# Altium PCB PCB.PcbDoc
Units mm, origin at the board's own origin, x right, y up, seen from the top; angles counter-clockwise.
Board outline 90 x 90 mm, 2 copper layers (Top Layer, Bottom Layer), stack 0.325 mm thick; 47 components, 141 nets, 406 pads, 91 vias.
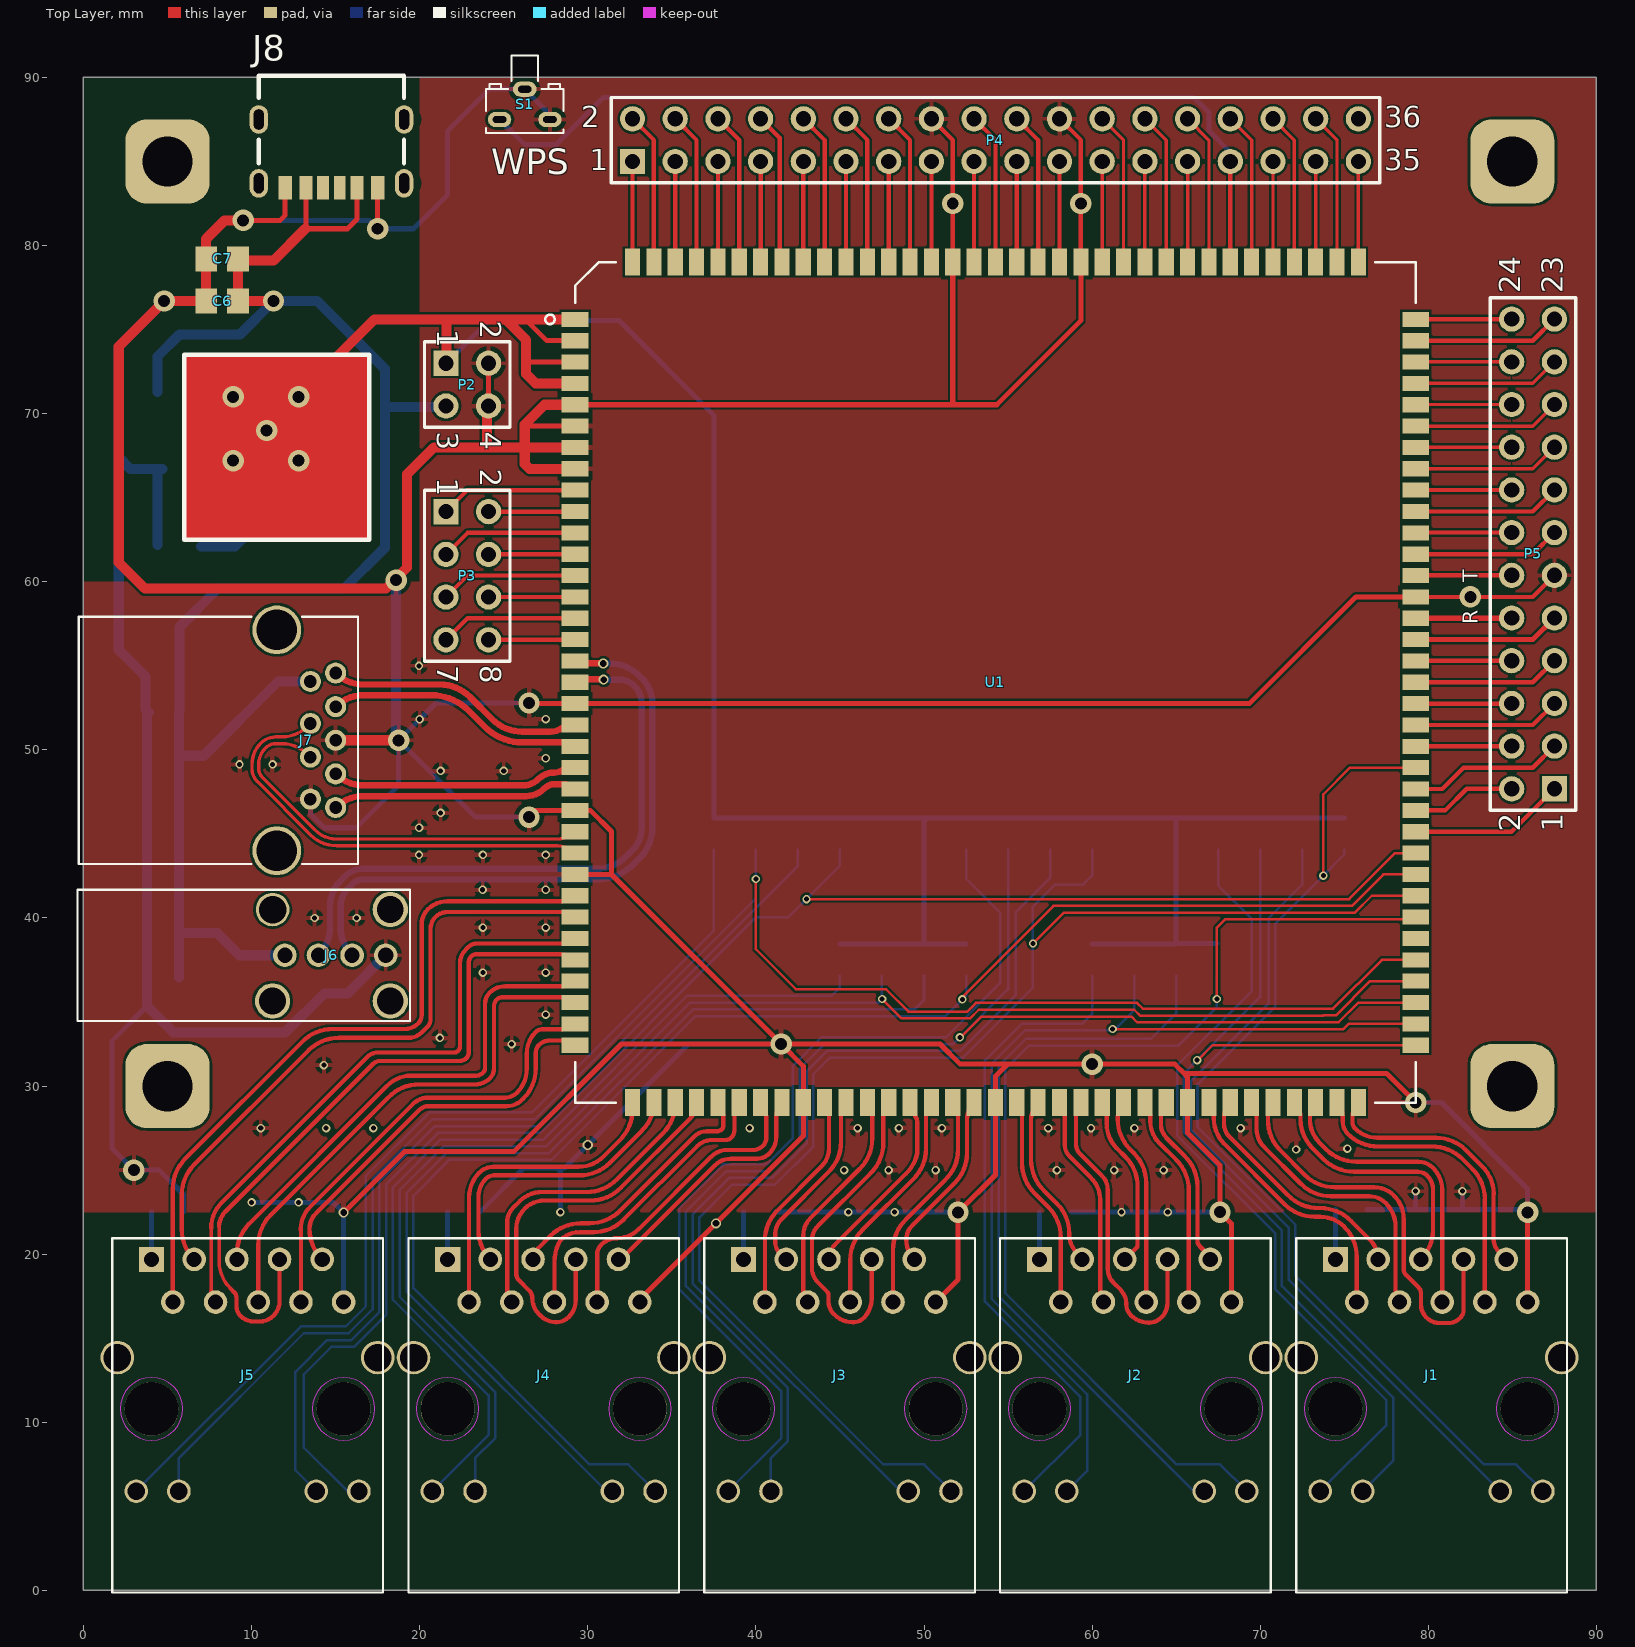
[diagram p0: Top Layer view]
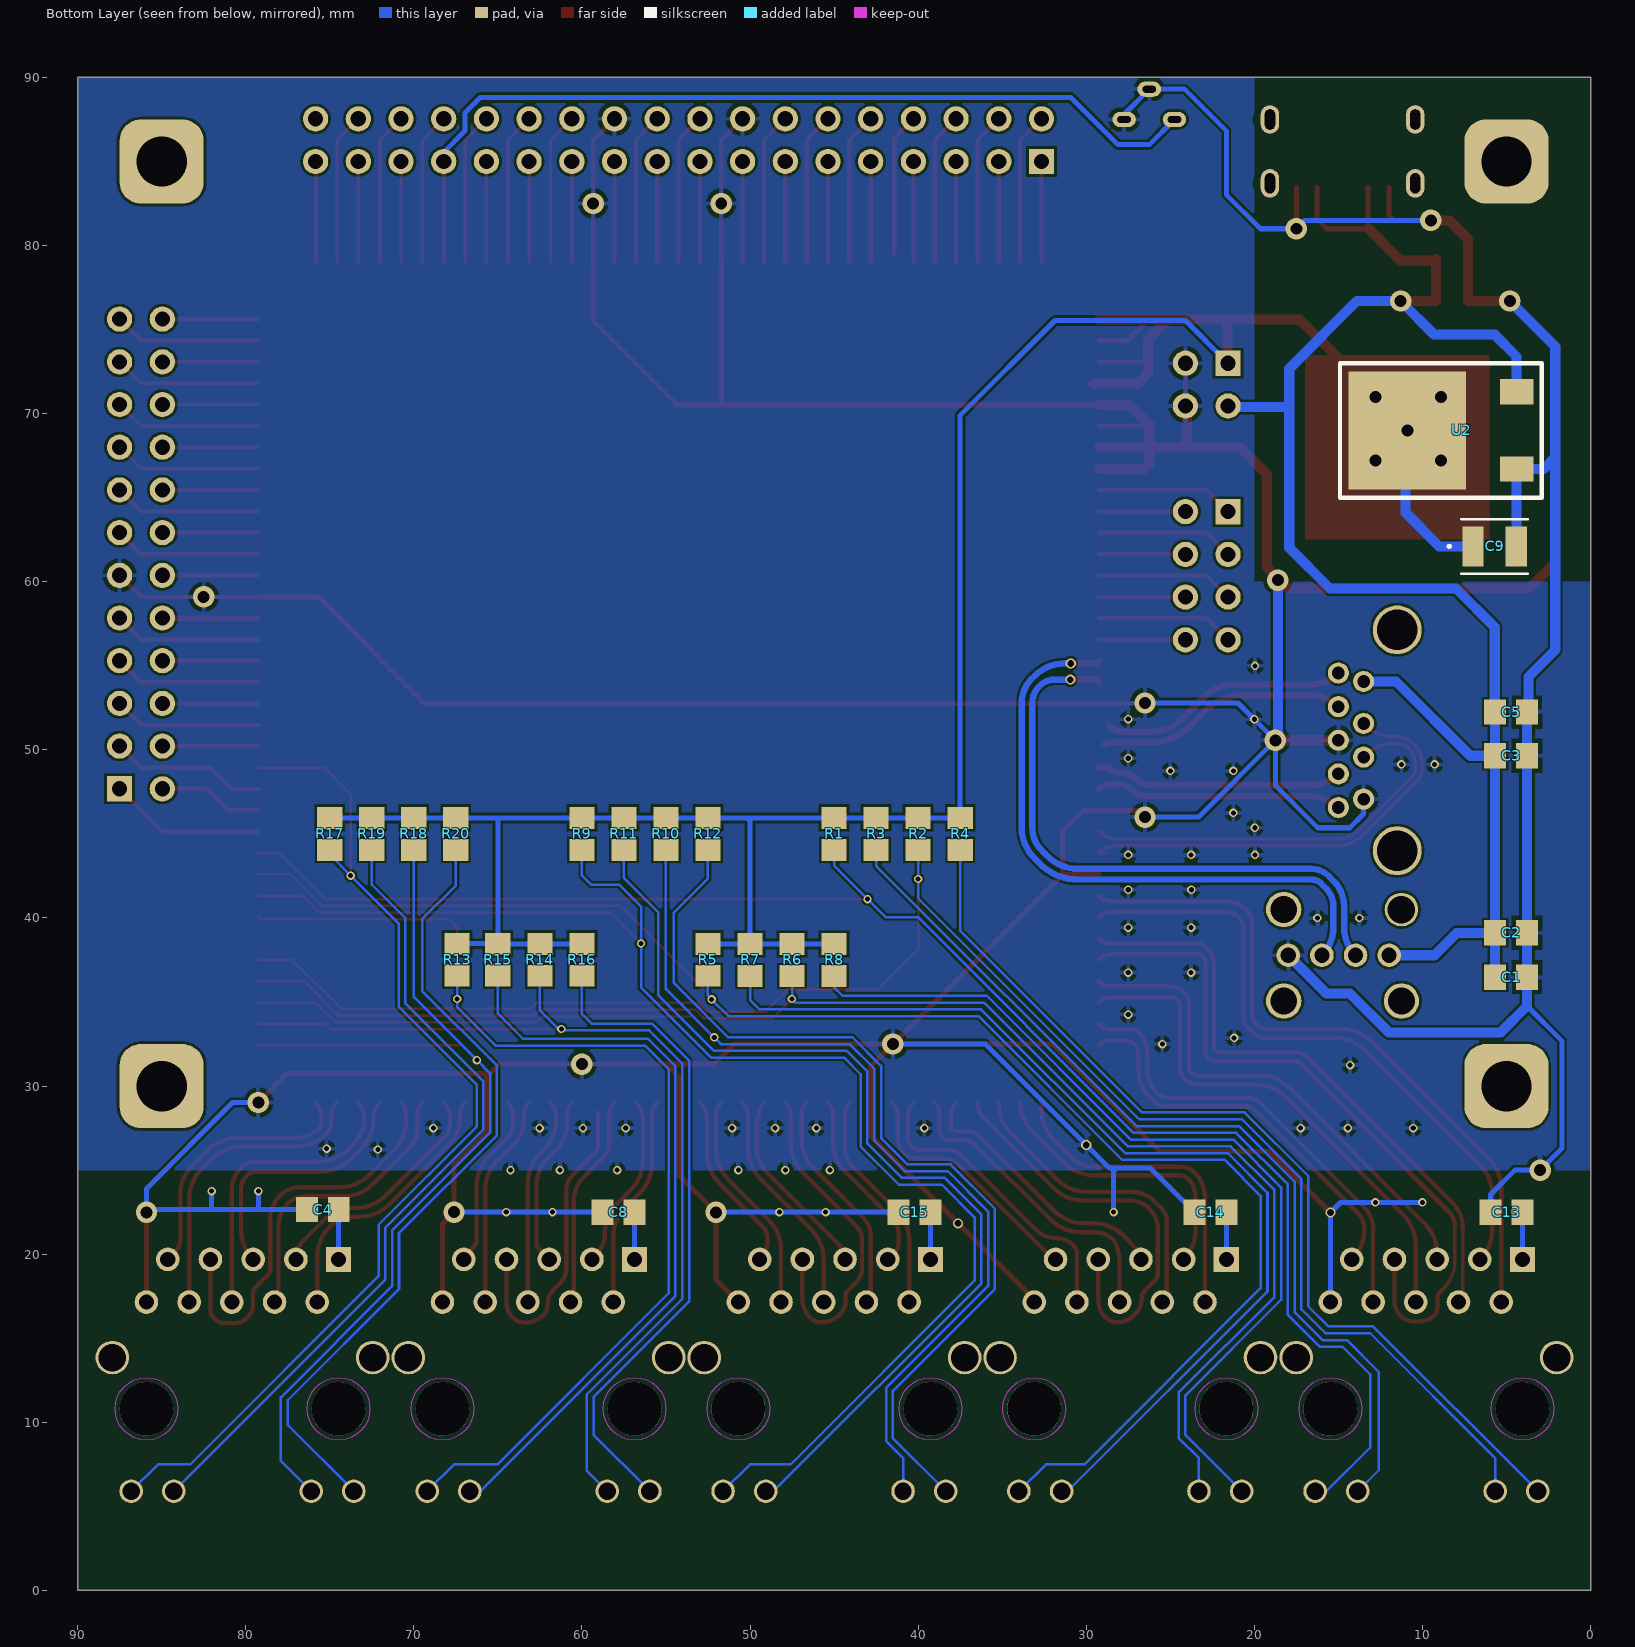
[diagram p1: Bottom Layer view, seen from below]

## Layer stack, top to bottom
Top Solder: solder mask 0.0102, Solder Resist, Dk 3.5
Top Layer: signal copper 0.0356
Dielectric 1: core 0.254, FR-4, Dk 4.2
Bottom Layer: signal copper 0.0356
Bottom Solder: solder mask 0.0102, Solder Resist, Dk 3.5

## Board outline
0,0 0,90 90,90 90,0

## Design rules (kind name [scope] priority, off if disabled: settings)
Clearance [All] p1: gap=0.15 ignorepadtopadclearanceinfootprint=FALSE
DiffPairsRouting DiffPair_DiffPairsRouting [All] p1: maxlimit=0.254 minlimit=0.2 mostfreqgap=0.2 toplayer_minwidth=0.2 toplayer_maxwidth=0.381 toplayer_prefwidth=0.2 bottomlayer_minwidth=0.2 bottomlayer_maxwidth=0.381 bottomlayer_prefwidth=0.2 maxuncoupledlength=12.7
DiffPairsRouting DiffPair_DiffPairsRouting_1 [All] p2: maxlimit=0.254 minlimit=0.254 mostfreqgap=0.254 toplayer_minwidth=0.381 toplayer_maxwidth=0.381 toplayer_prefwidth=0.381 bottomlayer_minwidth=0.381 bottomlayer_maxwidth=0.381 bottomlayer_prefwidth=0.381 maxuncoupledlength=12.7
DiffPairsRouting [All] p3: maxlimit=0.254 minlimit=0.254 mostfreqgap=0.254 toplayer_minwidth=0.381 toplayer_maxwidth=0.381 toplayer_prefwidth=0.381 bottomlayer_minwidth=0.381 bottomlayer_maxwidth=0.381 bottomlayer_prefwidth=0.381 maxuncoupledlength=12.7
MatchedLengths DiffPair_MatchedLengths [All] p1: tolerance=10 checknetsindiffpair=TRUE checkdiffpairvsdiffpair=FALSE checkxsignals=FALSE checkothers=FALSE
MatchedLengths DiffPair_MatchedLengths_1 [All] p2: tolerance=5 checknetsindiffpair=TRUE checkdiffpairvsdiffpair=FALSE checkxsignals=FALSE checkothers=FALSE
PolygonConnect [All] p1: connectstyle=Relief reliefconductorwidth=0.254 reliefentries=4 polygonreliefangle="90 Angle" airgapwidth=0.254
RoutingVias [All] p1: holewidth=0.711 width=1.27 viastyle="Through Hole" minholewidth=0.711 minwidth=1.27 maxholewidth=0.711 maxwidth=1.27
SolderMaskExpansion [All] p1: expansion=0.102
Width [All] p1: maxlimit=0.8 minlimit=0.15 preferedwidth=0.3
29 further rules are at their usual default settings.

## Classes and differential pairs
differential pair USB3: +USB3_P -USB3_N
differential pair USB3_SS_TX: +USB3_SS_TX_P -USB3_SS_TX_N
differential pair USB3_SS_RX: +USB3_SS_RX_P -USB3_SS_RX_N
differential pair USB2: +USB2_P -USB2_N
differential pair PCIE_TX2: +PCIE_TX2_P -PCIE_TX2_N
differential pair PCIE_TX1: +PCIE_TX1_P -PCIE_TX1_N
differential pair PCIE_TX0: +PCIE_TX0_P -PCIE_TX0_N
differential pair PCIE_RX2: +PCIE_RX2_P -PCIE_RX2_N
differential pair PCIE_RX1: +PCIE_RX1_P -PCIE_RX1_N
differential pair PCIE_RX0: +PCIE_RX0_P -PCIE_RX0_N
differential pair PCIE_CK2: +PCIE_CK2_P -PCIE_CK2_N
differential pair PCIE_CK1: +PCIE_CK1_P -PCIE_CK1_N
differential pair PCIE_CK0: +PCIE_CK0_P -PCIE_CK0_N

## Components (designator, comment, footprint, x,y, rotation, side; value= is the part's Value field where it differs from the comment)
C1 "Cap" 6-0805 4.725,36.475 r180 bottom value=0.1uF
C2 "Cap" 6-0805 4.725,39.125 r180 bottom value=106/10V
C3 "Cap" 6-0805 4.725,49.65 r180 bottom value=0.1uF
C4 "Cap" 6-0805 75.413,22.657 r0 bottom value=1nF/100V
C5 "Cap" 6-0805 4.725,52.25 r180 bottom value=106/10V
C6 "Cap" 6-0805 8.25,76.7 r0 top value=4.7uF
C7 "Cap" 6-0805 8.25,79.2 r0 top value=0.1uF
C8 "Cap" 6-0805 57.824,22.5 r0 bottom value=1nF/100V
C9 "Cap Pol2" 3528B 5.707,62.1 r180 bottom value=22uF
C13 "Cap" 6-0805 4.999,22.5 r0 bottom value=1nF/100V
C14 "Cap" 6-0805 22.615,22.5 r180 bottom value=1nF/100V
C15 "Cap" 6-0805 40.215,22.5 r0 bottom value=1nF/100V
J1 "RJ45_HR911130" RJ45_HR911130 74.475,10.8 r180 top locked
J2 "RJ45_HR911130" RJ45_HR911130 56.865,10.8 r180 top locked
J3 "RJ45_HR911130" RJ45_HR911130 39.265,10.8 r180 top locked
J4 "RJ45_HR911130" RJ45_HR911130 21.665,10.8 r180 top locked
J5 "RJ45_HR911130" RJ45_HR911130 4.045,10.8 r180 top locked
J6 "USB2.0" USB2.0 11.98,37.78 r270 top locked
J7 "USB3.0" USB3.0_0 13.5,54.07 r270 top locked
J8 "USB Type-C 6P" "USB Type-C 6P" 14.75,87.5 r180 top
P2 "Header 2X2" HDR2X2 21.56,73 r270 top
P3 "Header 4X2" HDR2X4 21.56,64.169 r270 top locked
P4 "Header 18X2" HDR2X18 32.661,85 r0 top locked
P5 "Header 12X2" HDR2X12 87.5,47.684 r90 top locked
R1 "Res2" 6-0805 45,45 r90 bottom value=4.7K
R2 "Res2" 6-0805 40,45 r270 bottom value=4.7K
R3 "Res2" 6-0805 42.5,45 r90 bottom value=330R
R4 "Res2" 6-0805 37.5,45 r270 bottom value=330R
R5 "Res2" 6-0805 52.5,37.51 r90 bottom value=4.7K
R6 "Res2" 6-0805 47.5,37.5 r270 bottom value=4.7K
R7 "Res2" 6-0805 50,37.5 r90 bottom value=330R
R8 "Res2" 6-0805 45,37.5 r270 bottom value=330R
R9 "Res2" 6-0805 60,45 r90 bottom value=4.7K
R10 "Res2" 6-0805 55,45 r270 bottom value=4.7K
R11 "Res2" 6-0805 57.5,45 r90 bottom value=330R
R12 "Res2" 6-0805 52.5,45 r270 bottom value=330R
R13 "Res2" 6-0805 67.427,37.52 r90 bottom value=4.7K
R14 "Res2" 6-0805 62.5,37.51 r270 bottom value=4.7K
R15 "Res2" 6-0805 65,37.52 r90 bottom value=330R
R16 "Res2" 6-0805 60,37.51 r270 bottom value=330R
R17 "Res2" 6-0805 75,45 r90 bottom value=4.7K
R18 "Res2" 6-0805 70,45 r270 bottom value=4.7K
R19 "Res2" 6-0805 72.5,45 r90 bottom value=330R
R20 "Res2" 6-0805 67.5,45 r270 bottom value=330R
S1 "SW_PB" SW_PB 26.25,89.3 r90 top
U1 "MT7621A" HLK-7621 29.25,75.61 r0 top locked
U2 "AMS1084CD-3.3" TO252 10.9,69 r90 bottom

## Footprints (in the part's own frame and the unit in brackets; to place one, negate y for a bottom-side part, rotate by r counter-clockwise, add the part's x,y. Pads: shape width x height; smd on the part's side, far side on the other; paste and mask are expansions set on the pad)
6-0805 [mm] "Chip Resistor; Body 2 x 1.2 mm (LxW typ)"
  rect 1.3x1.5 smd: 1(-0.95,0) 2(0.95,0)
3528B [mm]
  rect 1.262x2.363 smd paste+0 mask+0: 1(-1.293,0) 2(1.293,0)
  silkscreen extent -2.78,-1.63 1.98,1.63, body extent 0,0 0.25,0.25, height 0.25
HDR2X2 [mm] "Connector; Header; 2x2 Position"
  rect 1.5x1.5 hole 0.9: 1(0,0)
  round 1.5 hole 0.9: 2(0,2.54) 3(2.54,0) 4(2.54,2.54)
  silkscreen extent -1.27,-1.27 3.81,3.81
HDR2X4 [mm] "Connector; Header; 4x2 Position"
  rect 1.5x1.5 hole 0.9: 1(0,0)
  round 1.5 hole 0.9: 2(0,2.54) 3(2.54,0) 4(2.54,2.54) 5(5.08,0) 6(5.08,2.54) 7(7.62,0) 8(7.62,2.54)
  silkscreen extent -1.27,-1.27 8.89,3.81
HDR2X12 [mm] "Connector; Header; 12x2 Position"
  rect 1.5x1.5 hole 0.9: 1(0,0)
  round 1.5 hole 0.9: 2(0,2.54) 3(2.54,0) 4(2.54,2.54) 5(5.08,0) 6(5.08,2.54) 7(7.62,0) 8(7.62,2.54) 9(10.16,0) 10(10.16,2.54) 11(12.7,0) 12(12.7,2.54) 13(15.24,0) 14(15.24,2.54) 15(17.78,0) 16(17.78,2.54) 17(20.32,0) 18(20.32,2.54) 19(22.86,0) 20(22.86,2.54) 21(25.4,0) 22(25.4,2.54) 23(27.94,0) 24(27.94,2.54)
  silkscreen extent -1.27,-1.27 29.21,3.81
HDR2X18 [mm] "Connector; Header; 18x2 Position"
  rect 1.5x1.5 hole 0.9: 1(0,0)
  round 1.5 hole 0.9: 2(0,2.54) 3(2.54,0) 4(2.54,2.54) 5(5.08,0) 6(5.08,2.54) 7(7.62,0) 8(7.62,2.54) 9(10.16,0) 10(10.16,2.54) 11(12.7,0) 12(12.7,2.54) 13(15.24,0) 14(15.24,2.54) 15(17.78,0) 16(17.78,2.54) 17(20.32,0) 18(20.32,2.54) 19(22.86,0) 20(22.86,2.54) 21(25.4,0) 22(25.4,2.54) 23(27.94,0) 24(27.94,2.54) 25(30.48,0) 26(30.48,2.54) 27(33.02,0) 28(33.02,2.54) 29(35.56,0) 30(35.56,2.54) 31(38.1,0) 32(38.1,2.54) 33(40.64,0) 34(40.64,2.54) 35(43.18,0) 36(43.18,2.54)
  silkscreen extent -1.27,-1.27 44.45,3.81
HLK-7621 [mm]
  rect 1.6x0.9 smd: 1(0,0) 2(0,-1.27) 3(0,-2.54) 4(0,-3.81) 5(0,-5.08) 6(0,-6.35) 7(0,-7.62) 8(0,-8.89) 9(0,-10.16) 10(0,-11.43) 11(0,-12.7) 12(0,-13.97) 13(0,-15.24) 14(0,-16.51) 15(0,-17.78) 16(0,-19.05) 17(0,-20.32) 18(0,-21.59) 19(0,-22.86) 20(0,-24.13) 21(0,-25.4) 22(0,-26.67) 23(0,-27.94) 24(0,-29.21) 25(0,-30.48) 26(0,-31.75) 27(0,-33.02) 28(0,-34.29) 29(0,-35.56) 30(0,-36.83) 31(0,-38.1) 32(0,-39.37) 33(0,-40.64) 34(0,-41.91) 35(0,-43.18) 71(50,-43.18) 72(50,-41.91) 73(50,-40.64) 74(50,-39.37) 75(50,-38.1) 76(50,-36.83) 77(50,-35.56) 78(50,-34.29) 79(50,-33.02) 80(50,-31.75) 81(50,-30.48) 82(50,-29.21) 83(50,-27.94) 84(50,-26.67) 85(50,-25.4) 86(50,-24.13) 87(50,-22.86) 88(50,-21.59) 89(50,-20.32) 90(50,-19.05) 91(50,-17.78) 92(50,-16.51) 93(50,-15.24) 94(50,-13.97) 95(50,-12.7) 96(50,-11.43) 97(50,-10.16) 98(50,-8.89) 99(50,-7.62) 100(50,-6.35) 101(50,-5.08) 102(50,-3.81) 103(50,-2.54) 104(50,-1.27) 105(50,0)
  rect 0.9x1.6 smd: 36(3.41,-46.59) 37(4.68,-46.59) 38(5.95,-46.59) 39(7.22,-46.59) 40(8.49,-46.59) 41(9.76,-46.59) 42(11.03,-46.59) 43(12.3,-46.59) 44(13.57,-46.59) 45(14.84,-46.59) 46(16.11,-46.59) 47(17.38,-46.59) 48(18.65,-46.59) 49(19.92,-46.59) 50(21.19,-46.59) 51(22.46,-46.59) 52(23.73,-46.59) 53(25,-46.59) 54(26.27,-46.59) 55(27.54,-46.59) 56(28.81,-46.59) 56(28.81,-46.59) 57(30.08,-46.59) 58(31.35,-46.59) 59(32.62,-46.59) 60(33.89,-46.59) 61(35.16,-46.59) 62(36.43,-46.59) 63(37.7,-46.59) 64(38.97,-46.59) 65(40.24,-46.59) 66(41.51,-46.59) 67(42.78,-46.59) 68(44.05,-46.59) 69(45.32,-46.59) 70(46.59,-46.59) 106(46.59,3.41) 107(45.32,3.41) 108(44.05,3.41) 109(42.78,3.41) 110(41.51,3.41) 111(40.24,3.41) 112(38.97,3.41) 113(37.7,3.41) 114(36.43,3.41) 115(35.16,3.41) 116(33.89,3.41) 117(32.62,3.41) 118(31.35,3.41) 119(30.08,3.41) 120(28.81,3.41) 121(27.54,3.41) 122(26.27,3.41) 123(25,3.41) 124(23.73,3.41) 125(22.46,3.41) 126(21.19,3.41) 127(19.92,3.41) 128(18.65,3.41) 129(17.38,3.41) 130(16.11,3.41) 131(14.84,3.41) 132(13.57,3.41) 133(12.3,3.41) 134(11.03,3.41) 135(9.76,3.41) 136(8.49,3.41) 137(7.22,3.41) 138(5.95,3.41) 139(4.68,3.41) 140(3.41,3.41)
  silkscreen extent -1.78,-46.59 50,3.41
RJ45_HR911130 [mm]
  rect 1.5x1.5 hole 0.9: 1(0,-8.89)
  round 1.4 hole 0.9: 2(-1.27,-6.35) 3(-2.54,-8.89) 4(-3.81,-6.35) 5(-5.08,-8.89) 6(-6.35,-6.35) 7(-7.62,-8.89) 8(-8.89,-6.35) 9(-10.16,-8.89) 10(-11.43,-6.35)
  round 1.4 hole 1.03: 11(0.91,4.9) 12(-1.63,4.9) 13(-9.8,4.9) 14(-12.34,4.9)
  round 2 hole 1.63: ""(-13.46,-3.05)
  round 3.2 hole 3.2 unplated: ""(-11.43,0) ""(0,0)
  round 2 hole 1.63 unplated: ""(2.03,-3.05)
  Keep-Out Layer pour cut-out: -13.293,0 -13.257,-0.363 -13.151,-0.713 -12.979,-1.035 -12.747,-1.317 -12.465,-1.549 -12.143,-1.721 -11.793,-1.827 -11.43,-1.863 -11.067,-1.827 -10.717,-1.721 -10.395,-1.549 -10.113,-1.317 -9.881,-1.035 -9.709,-0.713 -9.603,-0.363 -9.567,0 -9.603,0.363 -9.709,0.713 -9.881,1.035 -10.113,1.317 -10.395,1.549 -10.717,1.721 -11.067,1.827 -11.43,1.863 -11.793,1.827 -12.143,1.721 -12.465,1.549 -12.747,1.317 -12.979,1.035 -13.151,0.713 -13.257,0.363
  Keep-Out Layer pour cut-out: -1.863,0 -1.827,-0.363 -1.721,-0.713 -1.549,-1.035 -1.317,-1.317 -1.035,-1.549 -0.713,-1.721 -0.363,-1.827 0,-1.863 0.363,-1.827 0.713,-1.721 1.035,-1.549 1.317,-1.317 1.549,-1.035 1.721,-0.713 1.827,-0.363 1.863,0 1.827,0.363 1.721,0.713 1.549,1.035 1.317,1.317 1.035,1.549 0.713,1.721 0.363,1.827 0,1.863 -0.363,1.827 -0.713,1.721 -1.035,1.549 -1.317,1.317 -1.549,1.035 -1.721,0.713 -1.827,0.363
  silkscreen extent -13.76,-10.15 2.33,10.92
SW_PB [mm]
  oval 0.9x1.4 hole 0.4 slot 0.8 at 90 deg: 1(-1.8,1.5) 2(-1.8,-1.5) 3(0,0)
  silkscreen extent -2.6,-2.3 2,2.3
TO252 [mm]
  rect 1.5x2 smd paste+0 mask+0: 1(-2.3,-6.5) 3(2.3,-6.5)
  rect 7x7 smd paste+0 mask+0: 2(0,0)
  silkscreen extent -4,-8 4,4
USB2.0 [mm]
  round 1.4 hole 0.9: 1(0,0) 2(0,2) 3(0,4) 4(0,6)
  round 2.1 hole 1.6: 5(2.72,-0.73) 7(2.72,6.27) 8(-2.72,6.27)
  round 2 hole 1.63: 6(-2.72,-0.73)
  silkscreen extent -3.9,-12.33 3.9,7.44
USB3.0_0 [mm]
  round 1.25 hole 0.75: 1(0,0) 2(2.5,0) 3(4.5,0) 4(7,0) 5(7.5,1.5) 6(5.5,1.5) 7(3.5,1.5) 8(1.5,1.5) 9(-0.5,1.5)
  round 2.9 hole 2.4: ""(-3.07,-2) ""(10.07,-2)
  silkscreen extent -3.85,-13.78 10.85,2.82
"USB Type-C 6P" [mm]
  rect 0.7x1.4 smd paste+0 mask+0: A5(-0.5,4.05) B5(0.5,4.05)
  rect 0.76x1.4 smd paste+0 mask+0: A9(1.52,4.05) B9(-1.52,4.05)
  rect 0.8x1.4 smd paste+0 mask+0: A12(2.75,4.05) B12(-2.75,4.05)
  oval 1.1x1.7 hole 1.2 slot 0.6 at 0 deg unplated: ""(-4.32,3.8) ""(-4.32,0) ""(4.32,3.8) ""(4.32,0)
  silkscreen extent -4.32,-2.6 4.32,2.6

## Part data
C1 C2 C3 C4 C5 C6 C7 C8 C13 C14 C15: "Capacitor", LatestRevisionDate=17-Jul-2002, LatestRevisionNote="Re-released for DXP Platform.", PackageDescription="Radial Cap, Thru-Hole; 2 Leads; 0.3 in Pin Spacing", PackageReference=RAD-0.3, Published=8-Jun-2000, Publisher="Altium Limited"
C9: "Polarized Capacitor (Axial)", LatestRevisionDate=17-Jul-2002, LatestRevisionNote="Re-released for DXP Platform.", PackageDescription="Polarized Capacitor; 2 Leads", PackageReference=POLAR0.8, Published=8-Jun-2000, Publisher="Altium Limited"
P2: "Header, 2-Pin, Dual row", LatestRevisionDate=17-Jul-2002, LatestRevisionNote="Re-released for DXP Platform.", Publisher="Altium Limited"
P3: "Header, 4-Pin, Dual row", LatestRevisionDate=17-Jul-2002, LatestRevisionNote="Re-released for DXP Platform.", Publisher="Altium Limited"
P4: "Header, 18-Pin, Dual row", LatestRevisionDate=17-Jul-2002, LatestRevisionNote="Re-released for DXP Platform.", Publisher="Altium Limited"
P5: "Header, 12-Pin, Dual row", LatestRevisionDate=17-Jul-2002, LatestRevisionNote="Re-released for DXP Platform.", Publisher="Altium Limited"
R1 R2 R3 R4 R5 R6 R7 R8 R9 R10 R11 R12 R13 R14 R15 R16 R17 R18 R19 R20: "Resistor", LatestRevisionDate=17-Jul-2002, LatestRevisionNote="Re-released for DXP Platform.", PackageDescription="Axial Device, Thru-Hole; 2 Leads; 0.4 in Pin Spacing", PackageReference=AXIAL-0.4, Published=8-Jun-2000, Publisher="Altium Limited"

## Free pads (board coordinates)
  rrect50% 5x5 hole 3: 1(5,85) 2(85,85) 3(5,30) 4(85,30)

## Via types
v1: diameter 0.5, hole 0.3, Top Layer to Bottom Layer, 63 vias
v2: diameter 1.27, hole 0.711, Top Layer to Bottom Layer, 23 vias
v3: diameter 0.6, hole 0.4, Top Layer to Bottom Layer, 5 vias

## Nets (pads, with @x,y where several pads share a name; then routed paths per layer and width w, separated by ;. In a path a pad name is that pad's centre, name@x,y a point inside that pad or via, vN(x,y) a via of type N, cw(c..) or ccw(c..) an arc to the next point about the centre after c; other vN are vias at no path point)
3V3: C9.1 P2.1 R1.2 R2.1 R3.2 R4.1 R5.2 R6.1 R7.2 R8.1 R9.2 R10.1 R11.2 R12.1 R13.2 R14.1 R15.2 R16.1 R17.2 R18.1 R19.2 R20.1 U1.1 U1.2 U1.3 U1.4 U2.2 | length 165.9
  Top Layer w0.3: v2@10.7,69 v2(10.9,69) ; v2@10.9,69.1 v2(10.9,69) ; v2@11,69 v2(10.9,69) ; 26.335,73.07 U1.3 ; 26.4,75.5 27.56,74.34 U1.2
  Top Layer w0.6: v2(8.9,67.2) v2@10.7,69 ; v2(8.9,71) v2(10.9,69) ; v2@10.9,69.1 v2(12.8,71) 12.8,71.1 17.31,75.61 21.6,75.61 ; v2@11,69 v2(12.8,67.2) ; P2.1@21.6,73 21.6,75.61 ; U1.1 25.1,75.61 ; U1.4@29.6,71.8 U1.4 26.9,71.8 26.335,72.365 26.335,73.07 26.335,74.375 25.1,75.61 ; 21.6,75.61 25.1,75.61
  Bottom Layer w0.3: P2.1 24.1,75.54 31.859,75.54 37.5,69.899 R4.1 R2.1 R3.2 R1.2 50.198,45.95 ; R8.1 R6.1 R7.2 ; R5.2 50.01,38.46 R7.2 ; R16.1 R14.1 64.99,38.46 R15.2 ; R13.2 R15.2 ; R17.2 R19.2 R18.1 R20.1 65.006,45.95 ; R7.2 50,45.752 50.198,45.95 ; 50.198,45.95 R12.1 R10.1 R11.2 R9.2 65.006,45.95 ; R15.2 65,45.944 65.006,45.95
  Bottom Layer w0.6: C9.1 9,62.1 11,64.1 U2.2@11,68.9
5VD: C1.1 C2.1 C3.1 C5.1 C6.2 C7.2 J6.1 J7.1 J8.A9 J8.B9 P2.3 U2.3 | length 101.4
  Top Layer w0.3: J8.A9 13.23,81.03 13.2,81 15.7,81 16.27,81.57 J8.B9
  Top Layer w0.6: C6.2 v2(11.3,76.7) ; C6.2@9.2,76.9 C7.2 9.3,79.1 11.3,79.1 13.2,81
  Bottom Layer w0.3: C1.1 5.675,36.425 C1.1@5.7,36.4 ; C2.1@5.675,39.325 C2.1@5.9,39.1 ; C3.1@5.675,49.725 C3.1@5.7,49.7
  Bottom Layer w0.6: U2.3 4.4,73.4 5.7,74.7 9.3,74.7 v2(11.3,76.7) 13.9,76.7 17.925,72.675 17.925,70.4 ; C1.1 C2.1 ; C2.1@5.675,39.325 C3.1 7.152,49.65 11.572,54.07 J7.1 ; C3.1@5.675,49.725 C5.1 ; C5.1@5.7,52.3 5.7,57.3 8,59.6 15.5,59.6 17.925,62.025 17.925,70.4 ; C2.1@5.9,39.1 7.959,39.1 9.279,37.78 J6.1 ; P2.3@21.7,70.5 21.6,70.4 17.925,70.4
A_POR_BPS: P5.1 U1.81 | length 9.3
  Top Layer w0.254: U1.81 84.946,45.13 P5.1
CH340_RX: P5.13 U1.94 | length 8.8
  Top Layer w0.254: U1.94 86.216,61.64 P5.13
CH340_TX: P5.12 U1.93 | length 5.7
  Top Layer w0.254: U1.93 79.264,60.384 P5.12
CTS2_N: P3.7 U1.15 | length 8.2
  Top Layer w0.254: P3.7 22.841,57.83 U1.15
CTS3_N: P3.1 U1.9 | length 8.2
  Top Layer w0.254: P3.1 22.841,65.45 U1.9
ESW_P0_LED_0: J5.12 R2.2 U1.75 | length 104
  Top Layer w0.15: v1(40,42.316) 40,38.138 42.38,35.758 47.745,35.758 49.068,34.435 52.579,34.435 53.089,34.946 62.674,34.946 63.019,34.6 73.584,34.6 73.59,34.606 74.331,34.606 77.235,37.51 U1.75
  Bottom Layer w0.15: J5.12 5.675,7.869 13.102,15.296 15.767,15.296 17.196,16.725 17.196,24.478 20.746,28.027 26.853,28.027 40,41.174 v1(40,42.316) R2.2
ESW_P0_LED_1: U1.76
ESW_P1_LED_0: J4.12 R6.2 U1.74 | length 89
  Top Layer w0.15: v1(47.506,35.179) 48.653,34.031 52.746,34.031 53.256,34.542 62.507,34.542 62.852,34.196 73.751,34.196 73.758,34.202 74.498,34.202 76.536,36.24 U1.74
  Bottom Layer w0.15: J4.12 23.295,7.869 24.504,9.078 24.504,11.766 18.812,17.458 18.812,23.808 21.415,26.411 27.523,26.411 36.082,34.97 47.322,34.97 47.5,35.148 R6.2
ESW_P2_LED_0: J3.12 R10.2 U1.73 | length 83.3
  Top Layer w0.15: v1(52.128,32.893) 52.179,32.893 53.424,34.138 62.339,34.138 62.685,33.792 73.919,33.792 73.925,33.798 74.666,33.798 75.837,34.97 U1.73
  Bottom Layer w0.15: J3.12 40.895,7.869 41.904,8.878 41.904,12.03 35.834,18.1 35.834,22.536 38.236,24.938 40.796,24.938 42.608,26.751 42.608,31.037 44.071,32.5 51.735,32.5 v1(52.128,32.893) 55,35.765 R10.2
ESW_P3_LED_0: J2.12 R14.2 U1.72 | length 58.5
  Top Layer w0.15: v1(61.222,33.394) 62.511,33.394 62.517,33.388 74.95,33.388 75.262,33.7 U1.72
  Bottom Layer w0.15: J2.12 59.704,7.109 59.704,11.667 54.031,17.34 54.031,31.347 55.992,33.308 61.308,33.308 v1(61.222,33.394) 61.394,33.394 62.5,34.5 R14.2
ESW_P4_LED_0: J1.12 R18.2 U1.71 | length 59.3
  Top Layer w0.15: v1(66.251,31.547) 66.29,31.547 67.173,32.43 U1.71
  Bottom Layer w0.15: R18.2 70,35.296 v1(66.251,31.547) 65.461,30.757 65.461,27.239 71.285,21.415 71.285,18.097 77.904,11.477 77.904,7.699 J1.12
GE_MDC: P5.3 U1.83 | length 9.3
  Top Layer w0.254: U1.83 80.825,47.67 82.095,48.94 86.216,48.94 P5.3
GE_MDIO: P5.2 U1.82 | length 6.2
  Top Layer w0.254: U1.82 81,46.4 82.284,47.684 P5.2
GE_RXCLK: P5.10 U1.91 | length 5.7
  Top Layer w0.3: U1.91 84.927,57.83 ccw(c84.927,57.877) P5.10
GE_RXD0: P5.8 U1.89 | length 5.7
  Top Layer w0.254: U1.89 79.264,55.304 P5.8
GE_RXD1: P5.7 U1.88 | length 8.8
  Top Layer w0.254: U1.88 86.216,54.02 P5.7
GE_RXD2: P5.6 U1.87 | length 5.7
  Top Layer w0.254: U1.87 84.946,52.75 P5.6
GE_RXD3: P5.5 U1.86 | length 8.8
  Top Layer w0.254: U1.86 86.216,51.48 P5.5
GE_RXDV: P5.9 U1.90 | length 8.8
  Top Layer w0.3: U1.90 86.216,56.56 P5.9
GE_TXCLK: P5.4 U1.85 | length 5.7
  Top Layer w0.254: U1.85 84.946,50.21 P5.4
GE_TXD0: J5.14 R1.1 U1.80 | length 96
  Top Layer w0.15: v1(43.01,41.123) 75.294,41.123 78.031,43.86 U1.80
  Bottom Layer w0.15: J5.14 15.7,5.9 13.102,8.498 13.102,12.851 14.739,14.488 16.102,14.488 18.004,16.39 18.004,24.143 21.081,27.219 27.188,27.219 40.019,40.05 41.937,40.05 v1(43.01,41.123) 45,43.113 R1.1
GE_TXD1: J4.14 R5.1 U1.79 | length 94
  Top Layer w0.15: v1(52.282,35.154) 52.282,35.307 57.693,40.719 75.461,40.719 77.332,42.59 U1.79
  Bottom Layer w0.15: J4.14 32.405,7.5 30.1,7.5 19.62,17.98 19.62,23.474 21.75,25.603 27.858,25.603 36.416,34.162 51.29,34.162 v1(52.282,35.154) 52.5,35.372 R5.1
GE_TXD2: J3.14 R9.1 U1.78 | length 86.5
  Top Layer w0.15: v1(56.483,38.481) 58.316,40.315 75.628,40.315 76.634,41.32 U1.78
  Bottom Layer w0.15: J3.14 50.005,7.5 47.576,7.5 36.642,18.434 36.642,22.191 38.581,24.13 41.13,24.13 43.416,26.416 43.416,30.702 44.406,31.692 52.318,31.692 56.483,35.857 v1(56.483,38.481) 56.483,40.676 57.793,41.986 59.469,41.986 60,42.517 R9.1
GE_TXD3: J2.14 R13.1 U1.77 | length 64.9
  Top Layer w0.15: v1(67.419,35.179) 67.419,39.421 67.909,39.911 79.111,39.911 U1.77
  Bottom Layer w0.15: R13.1 67.427,34.698 65.141,32.411 56.238,32.411 54.839,31.012 54.839,17.675 65.014,7.5 67.605,7.5 J2.14
GE_TXEN: J1.14 R17.1 U1.84 | length 62.4
  Top Layer w0.15: v1(73.754,42.52) 73.754,47.36 75.334,48.94 U1.84
  Bottom Layer w0.15: R17.1 75,43.765 v1(73.754,42.52) 70.904,39.669 70.904,34.74 66.269,30.105 66.269,27.574 72.093,21.75 72.093,18.707 83.3,7.5 85.215,7.5 J1.14
GND: C1.2 C2.2 C3.2 C4.2 C5.2 C6.1 C7.1 C8.2 C9.2 C13.2 C14.1 C15.2 J1.10 J2.10 J3.10 J4.10 J5.10 J6.4 J7.4 J7.7 J8.A12 J8.B12 P2.2 P2.4 P4.16 P4.22 P5.11 S1.2 S1.3 U1.5 U1.6 U1.7 U1.8 U1.19 U1.24 U1.27 U1.44 U1.53 U1.62 U1.92 U1.119 U1.125 U2.1 | length 588.3
  Top Layer w0.254: P4.16 51.71,86.271 v2(51.71,82.5) U1.125 ; P4.22 59.33,86.271 v2(59.33,82.5) U1.119 ; U1.92 v2(82.5,59.1) 86.216,59.1 P5.11
  Top Layer w0.3: v2@9.6,81.5 11.7,81.5 12,81.8 J8.A12 ; v3(15.475,22.481) 19.094,26.1 25.6,26.1 32,32.5 v2(41.5,32.5) ; v2(17.5,81) J8.B12 ; P2.4 P2.2 ; 26.25,69.35 26.34,69.26 U1.6 ; v2(26.5,46) 26.9,46.4 U1.24 30.152,46.4 31.41,45.142 31.41,42.59 ; v2(26.5,52.791) 26.541,52.75 U1.19 69.35,52.75 75.7,59.1 U1.92 ; U1.27 31.41,42.59 ; U1.5 51.71,70.53 ; J4.10 33.095,17.302 v3(37.63,21.837) 42.82,27.027 U1.44 42.82,31.18 v2(41.5,32.5) ; J3.10 52.027,18.482 v2(52.027,22.491) 54.25,24.714 U1.53 54.25,30.588 54.962,31.3 ; U1.125 51.71,70.53 ; U1.119 59.33,75.53 54.33,70.53 51.71,70.53 ; J2.10 68.295,21.81 v2(67.605,22.5) 67.605,25.295 65.68,27.22 U1.62 65.68,30.538 65.461,30.757 ; v2(79.25,29.02) 77.513,30.757 65.461,30.757 ; J1.10 v2(85.905,22.491) ; 31.41,42.59 v2(41.5,32.5) ; v2(41.5,32.5) 50.95,32.5 52.15,31.3 54.962,31.3 ; 54.962,31.3 v2(60,31.3) 64.918,31.3 65.461,30.757
  Top Layer w0.6: v2(9.5,81.5) 8.4,81.5 7.3,80.4 C7.1 C6.1 v2(4.8,76.7) 2.1,74 2.1,61.15 3.65,59.6 18,59.6 19.25,60.85 19.25,66.4 20.84,67.99 24,67.99 ; J7.7 v2(18.75,50.57) ; P2.4 24,70.36 24,67.99 ; U1.8 26.53,66.72 26.25,67 26.25,67.99 ; U1.7 26.25,67.99 ; U1.5 27.43,70.53 26.25,69.35 26.25,67.99 ; 24,67.99 26.25,67.99
  Bottom Layer w0.3: 3.775,34.757 1.71,32.692 1.71,26.29 v2(3,25) 4.5,25 5.949,23.551 C13.2 ; C2.2@3.775,39.325 C2.2@3.9,39.2 ; C5.2 3.775,52.275 C5.2@3.808,52.308 ; C9.2@4.4,62.2 C9.2@4.5,62.1 ; v2(9.5,81.5) 17,81.5 v2(17.5,81) 19.635,81 21.665,83.03 21.665,86.824 24.141,89.3 S1.3 27.75,87.8 S1.2 ; v1(10,23.08) v1(12.8,23.08) 14.876,23.08 v3(15.475,22.481) J5.10 ; J7.4 13.5,46.19 14.323,45.367 16.23,45.367 18.75,47.887 v2(18.75,50.57) ; v2@18.6,50.72 v2(18.75,50.57) ; C14.1 26.189,25.124 28.2,25.124 ; v2(26.5,46) 23.32,46 v2(18.75,50.57) ; v2(26.5,52.791) 20.971,52.791 v2(18.75,50.57) ; v1(28.372,22.5) 28.372,24.952 28.2,25.124 ; C15.2 52.018,22.5 v2(52.027,22.491) ; v2(41.5,32.5) 36,32.5 v3(30,26.5) 28.624,25.124 28.2,25.124 ; C8.2 v2(67.605,22.5) ; C4.2 79.25,22.657 ; v1(79.25,23.75) 79.25,22.657 ; v2(79.25,29.02) 80.78,29.02 85.905,23.895 v2(85.905,22.491) 85.739,22.657 82,22.657 ; v1(82.027,23.75) 82.027,22.684 82,22.657 ; 79.25,22.657 82,22.657
  Bottom Layer w0.6: C2.2 C1.2 3.775,34.757 5.335,33.197 12,33.197 14.303,35.5 15.7,35.5 J6.4 ; C2.2@3.775,39.325 C3.2 C5.2 ; C5.2@3.894,52.222 3.808,52.308 3.691,52.426 3.691,54.356 2.1,55.947 2.1,67.4 ; C9.2@4.4,62.2 U2.1 ; U2.1@4.7,66.7 U2.1 ; v2(4.8,76.7) 2.1,74 2.1,67.4 ; v2@18.6,50.72 v2(18.6,60.1) ; 2.1,67.4 2.8,66.7 U2.1
  other v1: 45.5,22.5 48.25,22.5 61.75,22.5 64.5,22.5 45.25,25 47.9,25 50.695,25 57.899,25 61.308,25 64.25,25 72.14,26.226 75.188,26.274 10.545,27.5 14.44,27.5 17.241,27.5 39.628,27.5 46.05,27.5 48.5,27.5 51.058,27.5 57.391,27.5 59.935,27.5 62.517,27.5 68.833,27.5 14.303,31.25 25.475,32.5 21.201,32.868 27.5,34.25 23.763,36.75 27.5,36.75 23.763,39.428 27.5,39.428 13.75,40 16.25,40 23.75,41.68 27.5,41.68 19.957,43.75 23.763,43.75 27.5,43.75 19.972,45.367 21.25,46.25 21.248,48.75 25,48.75 9.279,49.133 11.25,49.133 27.5,49.5 20,51.82 27.5,51.823 19.957,55
GPIO0: P5.23 U1.104 | length 8.8
  Top Layer w0.254: U1.104 86.216,74.34 P5.23
I2C_CLK: P5.15 U1.96 | length 8.8
  Top Layer w0.254: U1.96 86.216,64.18 P5.15
I2C_SDA: P5.16 U1.97 | length 5.7
  Top Layer w0.254: U1.97 79.264,65.464 P5.16
JTAG_CLK: P4.17 U1.124 | length 6
  Top Layer w0.254: U1.124@52.981,79.021 P4.17
JTAG_DI: P4.19 U1.122 | length 6
  Top Layer w0.254: U1.122@55.521,79.021 P4.19
JTAG_DO: P4.20 U1.121 | length 9
  Top Layer w0.254: P4.20 56.79,86.271 U1.121
JTAG_MS: P4.21 U1.120 | length 6
  Top Layer w0.254: U1.120@58.061,79.021 P4.21
JTAG_RST: P4.18 U1.123 | length 9
  Top Layer w0.254: P4.18 54.25,86.271 U1.123
LED_G0+: J5.11 R4.2 | length 57.5
  Bottom Layer w0.15: J5.11 12.935,15.7 15.6,15.7 16.792,16.892 16.792,24.645 20.579,28.431 26.686,28.431 37.5,39.245 R4.2
LED_G1+: J4.11 R8.2 | length 54
  Bottom Layer w0.15: J4.11 24.1,9.245 24.1,11.599 18.408,17.291 18.408,23.976 21.248,26.815 27.356,26.815 35.914,35.374 44.502,35.374 45,35.872 R8.2
LED_G2+: J3.11 R12.2 | length 56.6
  Bottom Layer w0.15: J3.11 41.5,9.045 41.5,11.862 35.43,17.932 35.43,22.703 38.069,25.342 40.628,25.342 42.204,26.918 42.204,31.204 43.904,32.904 51.301,32.904 54.53,36.133 54.53,40.321 52.5,42.351 R12.2
LED_G3+: J2.11 R16.2 | length 39.1
  Bottom Layer w0.15: J2.11 59.3,9.245 59.3,11.5 53.627,17.173 53.627,31.514 55.825,33.712 59.422,33.712 60,34.29 R16.2
LED_G4+: J1.11 R20.2 | length 47.6
  Bottom Layer w0.15: R20.2 67.5,41.927 69.5,39.927 69.5,35.66 65.057,31.217 65.057,27.072 70.881,21.248 70.881,17.929 77.5,11.31 77.5,9.835 J1.11
LED_Y0+: J5.13 R3.1 | length 55.5
  Bottom Layer w0.15: J5.13 12.6,7.145 12.6,13 14.492,14.892 15.935,14.892 17.6,16.558 17.6,24.31 20.913,27.623 27.021,27.623 42.5,43.102 R3.1
LED_Y1+: J4.13 R7.1 | length 60
  Bottom Layer w0.15: J4.13 31.1,5.9 19.216,17.784 19.216,23.641 21.583,26.007 27.69,26.007 36.249,34.566 49.434,34.566 50,35.132 R7.1
LED_Y2+: J3.13 R11.1 | length 58.7
  Bottom Layer w0.15: J3.13 48.605,5.9 36.238,18.267 36.238,22.368 38.403,24.534 40.963,24.534 43.012,26.583 43.012,30.87 44.239,32.096 52.15,32.096 55.47,35.416 55.47,40.349 57.5,42.379 R11.1
LED_Y3+: J2.13 R15.1 | length 44.8
  Bottom Layer w0.15: R15.1 65,34.308 63.507,32.815 56.071,32.815 54.435,31.18 54.435,17.508 66.043,5.9 J2.13
LED_Y4+: J1.13 R19.1 | length 48.5
  Bottom Layer w0.15: R19.1 72.5,41.982 70.5,39.982 70.5,34.907 65.865,30.272 65.865,27.406 71.689,21.583 71.689,18.486 J1.13
ND_ALE: P4.3 U1.138 | length 6
  Top Layer w0.254: U1.138@35.201,79.021 P4.3
ND_CLE: P4.4 U1.137 | length 9
  Top Layer w0.254: P4.4 36.47,86.271 U1.137
ND_CS_N: P4.5 U1.136 | length 6
  Top Layer w0.254: U1.136@37.741,79.021 P4.5
ND_D0: P4.8 U1.133 | length 8.5
  Top Layer w0.254: P4.8 41.412,86.409 U1.133@41.412,79.459
ND_D1: P4.9 U1.132 | length 6
  Top Layer w0.254: U1.132@42.821,79.021 P4.9
ND_D2: P4.10 U1.131 | length 9
  Top Layer w0.254: P4.10 44.09,86.271 U1.131
ND_D3: P4.11 U1.130 | length 6
  Top Layer w0.254: U1.130@45.361,79.021 P4.11
ND_D4: P4.12 U1.129 | length 9
  Top Layer w0.254: P4.12 46.63,86.271 U1.129
ND_D5: P4.13 U1.128 | length 6
  Top Layer w0.254: U1.128 P4.13@47.9,84.999
ND_D6: P4.14 U1.127 | length 9
  Top Layer w0.254: P4.14 49.17,86.271 U1.127
ND_D7: P4.15 U1.126 | length 6
  Top Layer w0.254: U1.126@50.441,79.021 P4.15
ND_RB_N: P4.7 U1.134 | length 6
  Top Layer w0.254: U1.134@40.281,79.021 P4.7
ND_RE_N: P4.6 U1.135 | length 9
  Top Layer w0.254: P4.6 39.01,86.271 U1.135
ND_WE_N: P4.2 U1.139 | length 9
  Top Layer w0.254: P4.2 33.93,86.271 U1.139
ND_WP: P4.1 U1.140 | length 6
  Top Layer w0.254: U1.140@32.661,79.021 P4.1
NetC4_1: C4.1 J1.1 | length 3
  Bottom Layer w0.3: C4.1 cw(c74.435,22.629) 74.475,22.629 J1.1
NetC8_1: C8.1 J2.1 | length 2.8
  Bottom Layer w0.3: J2.1 56.865,22.491 C8.1
NetC13_1: C13.1 J5.1 | length 2.8
  Bottom Layer w0.3: J5.1 4.045,22.496 C13.1
NetC14_2: C14.2 J4.1 | length 2.8
  Bottom Layer w0.3: J4.1 C14.2@21.665,22.5
NetC15_1: C15.1 J3.1 | length 2.8
  Bottom Layer w0.3: J3.1 C15.1
NetJ1_2: J1.2 U1.63 | length 16.4
  Top Layer w0.254: U1.63 cw(c66.246,28.316) 67.241,28.316 67.241,28.067 ccw(c69.388,28.067) 67.87,26.549 71.45,22.969 ccw(c73.247,24.765) 73.247,22.225 73.56,22.225 cw(c73.56,20.187) 75.001,21.628 cw(c73.205,19.832) 75.745,19.832 J1.2
NetJ1_3: J1.3 U1.64 | length 14.2
  Top Layer w0.254: U1.64 ccw(c69.111,28.129) 67.851,28.129 67.851,27.737 ccw(c68.893,27.737) 68.156,27 71.669,23.487 ccw(c73.465,25.283) 73.465,22.743 73.584,22.743 cw(c73.584,20.203) 75.38,21.999 76.539,20.84 cw(c75.389,19.69) J1.3
NetJ1_4: J1.4 U1.65 | length 17.8
  Top Layer w0.2: J1.4@78.138,17.505 ccw(c78.64,17.505) J1.4
  Top Layer w0.254: U1.65 cw(c68.786,28.316) 69.781,28.316 69.781,27.462 ccw(c71.326,27.462) 70.234,26.37 72.416,24.188 ccw(c74.212,25.984) 74.212,23.444 76.489,23.444 cw(c76.489,22.057) 77.47,23.038 cw(c76.06,21.627) 78.054,21.627 78.054,17.707 ccw(c78.842,17.707) J1.4
NetJ1_5: J1.5 U1.67 | length 15.6
  Top Layer w0.254: U1.67 cw(c71.143,28.133) 72.398,28.133 72.398,28.016 ccw(c74.796,28.016) 73.1,26.321 73.771,25.649 ccw(c75.567,27.445) 75.567,24.905 79.357,24.905 cw(c79.357,24.079) 79.941,24.663 cw(c79.136,23.858) 80.275,23.858 80.275,21.429 cw(c77.816,21.429) J1.5
NetJ1_6: J1.6 U1.68 | length 18
  Top Layer w0.254: U1.68 ccw(c74.13,28.19) 72.956,28.19 72.956,28.016 ccw(c74.919,28.016) 73.531,26.629 73.914,26.246 ccw(c75.71,28.042) 75.71,25.502 79.408,25.502 cw(c79.408,24.275) 80.275,25.142 cw(c78.948,23.815) 80.825,23.815 J1.6
NetJ1_7: J1.7 U1.66 | length 24.4
  Top Layer w0.254: U1.66 ccw(c71.467,28.313) 70.467,28.313 70.467,27.94 ccw(c72.981,27.94) 71.204,26.162 72.644,24.722 ccw(c74.44,26.518) 74.44,23.978 76.787,23.978 cw(c76.787,22.33) 77.953,23.495 cw(c76.542,22.085) 78.537,22.085 78.537,19.09 ccw(c78.983,19.09) 78.668,18.774 79.433,18.009 cw(c79.127,17.702) 79.56,17.702 79.56,17.008 ccw(c80.658,17.008) 79.882,16.232 79.883,16.231 ccw(c80.68,17.028) 80.68,15.9 81.169,15.9 ccw(c81.169,16.924) 81.892,16.2 81.897,16.205 ccw(c81.42,16.683) 82.095,16.683 J1.7
NetJ1_8: J1.8 U1.69 | length 18.2
  Top Layer w0.254: U1.69 cw(c73.744,28.194) 74.912,28.194 74.912,27.884 ccw(c75.95,27.884) 75.216,27.15 ccw(c77.012,28.946) 77.012,26.406 80.231,26.406 cw(c80.231,23.866) 82.027,25.662 82.621,25.068 cw(c80.825,23.272) 83.365,23.272 J1.8
NetJ1_9: J1.9 U1.70 | length 16
  Top Layer w0.254: U1.70 ccw(c76.67,28.19) 75.496,28.19 75.496,27.801 ccw(c75.946,27.801) 75.628,27.483 ccw(c76.977,28.832) 76.977,26.924 80.452,26.924 cw(c80.452,24.384) 82.248,26.18 83.213,25.216 cw(c81.583,23.586) 83.888,23.586 ; 83.878,23.586 83.878,20.95 ccw(c85.094,20.95) 84.234,20.091 J1.9
NetJ2_2: J2.2 U1.54 | length 12.7
  Top Layer w0.254: U1.54 cw(c54.772,28.272) 55.83,28.272 55.83,25.418 ccw(c58.37,25.418) 56.574,23.621 57.391,22.804 cw(c55.595,21.008) 58.135,21.008 J2.2
NetJ2_3: J2.3 U1.55 | length 10.4
  Top Layer w0.254: U1.55 ccw(c57.803,28.007) 56.37,28.007 56.37,25.602 ccw(c58.91,25.602) 57.114,23.806 57.899,23.021 cw(c56.103,21.225) 58.643,21.225 58.643,20.928 ccw(c61.095,21.592) 59.299,19.796 J2.3
NetJ2_4: J2.4 U1.56 | length 12.8
  Top Layer w0.254: U1.56@58.06,29.02 cw(c57.295,28.255) 58.377,28.255 58.377,26.483 ccw(c59.293,26.483) 58.645,25.836 59.935,24.546 cw(c58.627,23.237) 60.477,23.237 60.477,17.627 ccw(c61.152,17.627) J2.4
NetJ2_5: J2.5 U1.58 | length 10.3
  Top Layer w0.254: U1.58 cw(c59.958,28.378) 60.866,28.378 60.866,27.762 ccw(c62.941,27.762) 61.474,26.295 61.973,25.796 cw(c60.201,24.024) 62.707,24.024 62.707,20.507 cw(c62.238,20.701) 62.597,20.342 J2.5
NetJ2_6: J2.6 U1.59 | length 12.4
  Top Layer w0.254: U1.59 ccw(c62.7,28.19) 61.526,28.19 61.526,28.027 ccw(c64.066,28.027) 62.27,26.231 62.471,26.03 cw(c60.675,24.234) 63.215,24.234 J2.6
NetJ2_7: J2.7 U1.57 | length 18.7
  Top Layer w0.254: U1.57@59.042,28.448 59.042,26.522 ccw(c59.801,26.522) 59.264,25.986 60.587,24.663 cw(c59.746,23.823) 60.935,23.823 60.935,19.101 ccw(c62.032,19.101) 61.256,18.325 61.75,17.831 ; 61.755,17.78 cw(c61.08,17.105) 62.034,17.105 62.034,17.007 ccw(c62.928,17.007) 62.296,16.375 ccw(c63.381,17.461) 63.381,15.926 ccw(c63.381,16.966) 64.117,16.231 ccw(c63.229,17.119) 64.485,17.119 J2.7
NetJ2_8: J2.8 U1.60 | length 12.7
  Top Layer w0.254: U1.60 cw(c62.375,28.255) 63.457,28.255 63.457,27.915 ccw(c65.296,27.915) 63.996,26.614 65.011,25.598 cw(c63.215,23.802) 65.755,23.802 J2.8
NetJ2_9: J2.9 U1.61 | length 10.4
  Top Layer w0.254: U1.61 ccw(c65.178,28.252) 64.092,28.252 64.092,27.711 ccw(c65.196,27.711) 64.415,26.931 65.525,25.821 cw(c63.729,24.025) 66.269,24.025 66.269,20.796 ccw(c66.727,20.796) 66.403,20.472 66.911,19.964 cw(c66.637,19.69) J2.9
NetJ3_2: J3.2 U1.45 | length 13.3
  Top Layer w0.254: J3.2 40.535,20.806 cw(c43.075,20.806) 41.279,22.602 43.917,25.24 ccw(c42.882,26.274) 44.345,26.274 44.345,28.404 ccw(c43.474,28.404) U1.45
NetJ3_3: J3.3 U1.46 | length 11.1
  Top Layer w0.254: J3.3 41.393,20.102 cw(c41.967,20.676) 41.156,20.676 41.156,21.209 cw(c42.382,21.209) 41.515,22.076 44.323,24.885 ccw(c42.527,26.681) 45.067,26.681 45.067,28.313 cw(c46.067,28.313) U1.46
NetJ3_4: J3.4 U1.47 | length 14.1
  Top Layer w0.254: J3.4@42.879,17.623 ccw(c43.548,17.623) J3.4 cw(c43.691,17.766) 42.82,17.766 42.82,21.109 cw(c44.296,21.109) 43.252,22.153 46.177,25.078 ccw(c44.381,26.874) 46.921,26.874 46.921,28.316 ccw(c45.926,28.316) U1.47
NetJ3_5: J3.5 U1.49 | length 11.5
  Top Layer w0.254: J3.5 cw(c45.594,19.69) 44.711,20.573 48.96,24.822 ccw(c47.309,26.473) 49.596,26.004 49.596,27.888 ccw(c49.137,27.888) 49.461,28.212 49.461,28.316 ccw(c48.466,28.316) U1.49
NetJ3_6: J3.6 U1.50 | length 13.6
  Top Layer w0.254: J3.6 45.615,19.663 cw(c48.155,19.663) 46.359,21.459 49.378,24.478 ccw(c47.582,26.274) 50.122,26.274 50.122,28.252 cw(c51.208,28.252) U1.50
NetJ3_7: J3.7 U1.48 | length 20.3
  Top Layer w0.2: U1.48@47.582,28.252 cw(c48.668,28.252) U1.48
  Top Layer w0.254: J3.7 46.885,17.344 cw(c45.275,17.344) 46.413,16.205 cw(c45.8,16.818) 45.8,15.951 45.765,15.951 cw(c45.765,17.512) 44.661,16.408 44.623,16.446 cw(c45.348,17.17) 44.323,17.17 44.323,17.556 ccw(c44.001,17.556) 44.229,17.784 43.697,18.315 cw(c44.579,19.197) 43.332,19.197 43.332,20.812 cw(c44.572,20.812) 43.696,21.689 46.838,24.831 ccw(c45.042,26.627) 47.582,26.627 U1.48@47.582,28.252
NetJ3_8: J3.8 U1.51 | length 13.3
  Top Layer w0.254: J3.8 48.155,20.249 cw(c50.695,20.249) 48.899,22.046 51.283,24.429 ccw(c49.487,26.226) 52.027,26.226 52.027,28.255 ccw(c50.945,28.255) U1.51
NetJ3_9: J3.9 U1.52 | length 10.9
  Top Layer w0.254: J3.9 cw(c50.59,20.855) 48.942,20.855 cw(c50.121,20.855) 49.287,21.689 51.814,24.215 ccw(c50.018,26.012) 52.558,26.012 52.558,28.001 cw(c53.999,28.001) U1.52
NetJ4_2: J4.2 U1.36 | length 19.3
  Top Layer w0.254: J4.2 22.935,23.368 cw(c25.035,23.368) 23.55,24.853 cw(c24.38,24.023) 24.38,25.197 29.448,25.197 ccw(c29.448,27.298) 30.934,25.812 31.916,26.794 ccw(c30.12,28.59) 32.66,28.59 U1.36
NetJ4_3: J4.3 U1.37 | length 17.3
  Top Layer w0.254: J4.3 cw(c25.901,21.386) 23.503,21.386 23.503,23.443 cw(c24.977,23.443) 23.934,24.486 cw(c24.425,23.995) 24.425,24.689 29.512,24.689 ccw(c29.512,27.229) 31.308,25.433 33.248,27.373 ccw(c31.6,29.02) U1.37
NetJ4_4: J4.4 U1.38 | length 18.9
  Top Layer w0.254: J4.4@25.266,17.655 ccw(c25.98,17.655) J4.4 cw(c26.128,17.803) 25.204,17.803 25.204,21.899 cw(c26.442,21.899) 25.567,22.774 25.937,23.144 cw(c27.276,21.805) 27.276,23.698 29.928,23.698 ccw(c29.928,26.238) 31.724,24.442 34.456,27.174 ccw(c32.66,28.97) 35.2,28.97 U1.38
NetJ4_5: J4.5 U1.40 | length 15.9
  Top Layer w0.254: J4.5 cw(c27.437,19.69) J4.5@26.948,20.179 ; J4.5@27.004,20.317 27.781,21.093 cw(c29.577,19.297) 29.577,21.837 30.111,21.837 ccw(c30.111,24.377) 31.907,22.581 36.329,27.003 cw(c37.083,26.249) 37.083,27.315 37.698,27.315 ccw(c37.698,27.715) 37.981,27.432 ccw(c37.797,27.616) 38.057,27.616 38.057,28.255 ccw(c36.975,28.255) U1.40
NetJ4_6: J4.6 U1.41 | length 18.4
  Top Layer w0.254: J4.6 28.015,19.538 cw(c30.555,19.538) 28.372,20.838 cw(c29.514,19.696) 29.514,21.311 30.338,21.311 ccw(c30.338,23.851) 32.134,22.055 36.49,26.411 cw(c37.422,25.48) 37.422,26.797 38.228,26.797 ccw(c38.228,27.21) 38.521,26.918 ccw(c38.023,27.416) 38.727,27.416 38.727,28.336 cw(c39.694,28.336) U1.41
NetJ4_7: J4.7 U1.39 | length 25.3
  Top Layer w0.254: J4.7 29.285,17.277 cw(c27.841,17.277) 28.862,16.256 cw(c28.126,16.992) 28.126,15.951 cw(c28.126,17.263) 27.198,16.335 27.087,16.447 cw(c28.013,17.374) 26.703,17.374 ccw(c26.037,17.374) 26.508,17.845 25.933,18.419 cw(c26.406,18.891) 25.738,18.891 25.738,21.491 cw(c27.449,21.491) 26.239,22.701 cw(c27.42,21.52) 27.42,23.19 30.159,23.19 ccw(c30.159,25.73) 31.956,23.934 36.066,28.045 ccw(c35.091,29.02) U1.39
NetJ4_8: J4.8 U1.42 | length 18
  Top Layer w0.254: J4.8 30.555,19.974 cw(c31.379,19.974) 30.796,20.557 cw(c31.758,19.596) 31.758,20.955 ccw(c31.758,22.741) 33.02,21.478 37.345,25.803 cw(c38.311,24.838) 37.707,26.062 cw(c38.311,24.838) 38.137,26.192 cw(c38.311,24.838) 38.311,26.203 ; 38.311,26.192 39.813,26.192 ccw(c39.813,27.053) 40.422,26.444 ccw(c39.938,26.928) 40.622,26.928 40.622,28.194 ccw(c39.454,28.194) U1.42
NetJ4_9: J4.9 U1.43 | length 14.7
  Top Layer w0.254: J4.9 ccw(c31.825,20.044) 32.075,19.794 37.579,25.297 cw(c38.502,24.374) 38.502,25.679 40.063,25.679 ccw(c40.063,26.722) 40.801,25.985 ccw(c39.821,26.965) 41.206,26.965 41.206,28.19 cw(c42.38,28.19) U1.43
NetJ5_2: J5.2 U1.28 | length 41.7
  Top Layer w0.254: J5.2 5.315,23.889 cw(c7.855,23.889) 6.059,25.686 13.024,32.65 cw(c14.82,30.854) 14.82,33.394 19.12,33.394 ccw(c19.12,34.515) 19.912,33.722 ccw(c19.421,34.214) 20.116,34.214 20.116,39.634 cw(c21.359,39.634) 20.48,40.513 cw(c21.645,39.348) 21.645,40.996 28.467,40.996 ccw(c28.467,42.103) U1.28
NetJ5_3: J5.3 U1.29 | length 38.3
  Top Layer w0.254: J5.3 cw(c8.36,21.465) 5.85,21.465 5.85,23.535 cw(c8.39,23.535) 6.594,25.331 13.386,32.124 cw(c15.182,30.328) 15.182,32.868 19.33,32.868 ccw(c19.33,33.992) 20.125,33.197 20.477,33.549 ccw(c20.067,33.96) 20.648,33.96 20.648,39.357 cw(c21.636,39.357) 20.937,40.056 cw(c21.673,39.32) 21.673,40.361 28.5,40.361 cw(c28.5,39.3) U1.29
NetJ5_4: J5.4 U1.30 | length 36.8
  Top Layer w0.2: J5.4@7.595,17.779 7.595,21.549
  Top Layer w0.254: J5.4@7.595,17.779 ccw(c8.484,17.779) J5.4 ; 7.595,21.549 cw(c9.76,21.549) 8.229,23.08 16.883,31.735 cw(c17.534,31.084) 17.534,32.004 22.061,32.004 ccw(c22.061,32.318) 22.283,32.096 ccw(c22.001,32.379) 22.4,32.379 22.4,37.313 cw(c23.529,37.313) 22.731,38.11 22.923,38.303 cw(c23.354,37.872) 23.354,38.481 28.528,38.481 ccw(c28.528,39.502) U1.30
NetJ5_5: J5.5 U1.32 | length 30
  Top Layer w0.254: J5.5 9.125,20.029 cw(c11.665,20.029) 9.869,21.825 18.075,30.031 cw(c19.502,28.604) 19.502,30.622 23.354,30.622 ccw(c23.354,31.201) 23.763,30.791 ccw(c23.472,31.082) 23.884,31.082 23.884,34.885 cw(c24.838,34.885) 24.163,35.56 cw(c25.083,34.64) 25.083,35.941 28.528,35.941 ccw(c28.528,36.962) U1.32
NetJ5_6: J5.6 U1.33 | length 31.2
  Top Layer w0.254: J5.6 10.395,20.537 cw(c12.935,20.537) 11.139,22.333 18.161,29.355 cw(c19.957,27.559) 19.957,30.099 23.299,30.099 ccw(c23.299,31.344) 24.179,30.464 ccw(c23.606,31.037) 24.417,31.037 24.417,34.724 cw(c25.024,34.724) 24.595,35.154 cw(c24.901,34.847) 24.901,35.281 28.5,35.281 cw(c28.5,34.22) U1.33
NetJ5_7: J5.7 U1.31 | length 42.8
  Top Layer w0.2: 8.069,21.641 8.069,19.589 ccw(c10.374,19.589) 8.744,17.959
  Top Layer w0.254: 8.069,21.641 cw(c9.324,21.641) 8.436,22.528 17.241,31.333 cw(c17.635,30.938) 17.635,31.496 22.398,31.496 ccw(c22.398,32.016) 22.766,31.648 ccw(c22.398,32.016) 22.918,32.016 22.918,37.351 cw(c23.439,37.351) 23.071,37.719 cw(c23.377,37.412) 23.377,37.846 28.439,37.846 cw(c28.439,36.699) U1.31 ; 8.744,17.959 8.974,17.729 cw(c8.667,17.423) 9.101,17.423 9.101,16.887 ccw(c9.881,16.887) 9.329,16.335 ccw(c10.135,17.141) 10.135,16.002 10.495,16.002 ccw(c10.495,17.141) 11.3,16.335 ccw(c10.419,17.217) 11.665,17.217 J5.7
NetJ5_8: J5.8 U1.34 | length 27.4
  Top Layer w0.254: 12.921,21.438 cw(c14.9,21.438) 12.935,21.669 ; J5.8 12.935,21.669 ; U1.34 cw(c28.467,34.483) 28.467,33.376 27.274,33.376 ccw(c27.274,32.855) 26.906,33.223 ccw(c28.194,31.935) 26.373,31.935 26.373,31.038 cw(c24.342,31.038) 25.778,29.602 cw(c25.078,30.302) 25.078,29.312 20.5,29.312 ccw(c20.5,28.047) 19.606,28.941 13.501,22.836 ccw(c14.9,21.438) 12.935,21.669
NetJ5_9: J5.9 U1.35 | length 23.9
  Top Layer w0.254: J5.9 14.188,19.707 cw(c15.984,21.503) 13.444,21.503 cw(c14.758,21.503) 13.829,22.432 19.972,28.575 cw(c20.524,28.023) 20.524,28.804 25.154,28.804 ccw(c25.154,30.153) 26.108,29.199 26.162,29.253 ccw(c24.366,31.05) 26.906,31.05 26.906,32.007 cw(c27.513,32.007) 27.084,32.436 cw(c27.759,31.761) 27.759,32.715 28.561,32.715 cw(c28.561,31.741) U1.35
PCIE_CK0_N: P4.23 U1.118 | length 6
  Top Layer w0.2: U1.118@60.601,79.021 P4.23
PCIE_CK0_P: P4.24 U1.117 | length 9
  Top Layer w0.2: P4.24 61.87,86.271 U1.117
PCIE_CK1_N: P4.31 U1.110 | length 6
  Top Layer w0.2: U1.110@70.761,79.021 P4.31
PCIE_CK1_P: P4.30 U1.111 | length 9
  Top Layer w0.2: P4.30 69.49,86.271 U1.111
PCIE_CK2_N: P5.21 U1.102 | length 8.8
  Top Layer w0.2: U1.102 86.216,71.8 P5.21
PCIE_CK2_P: P5.22 U1.103 | length 5.7
  Top Layer w0.2: U1.103 79.264,73.084 P5.22
PCIE_RX0_N: P4.27 U1.114 | length 6
  Top Layer w0.2: U1.114@65.681,79.021 P4.27
PCIE_RX0_P: P4.28 U1.113 | length 9
  Top Layer w0.2: P4.28 66.95,86.271 U1.113
PCIE_RX1_N: P4.32 U1.109 | length 9
  Top Layer w0.2: P4.32 72.03,86.271 U1.109
PCIE_RX1_P: P4.33 U1.108 | length 6
  Top Layer w0.2: U1.108@73.301,79.021 P4.33
PCIE_RX2_N: P5.20 U1.101 | length 5.7
  Top Layer w0.2: U1.101 79.264,70.544 P5.20
PCIE_RX2_P: P5.19 U1.100 | length 8.8
  Top Layer w0.2: U1.100 86.216,69.26 P5.19
PCIE_TX0_N: P4.26 U1.115 | length 9
  Top Layer w0.2: P4.26 64.41,86.271 U1.115
PCIE_TX0_P: P4.25 U1.116 | length 6
  Top Layer w0.2: U1.116@63.141,79.021 P4.25
PCIE_TX1_N: P4.34 U1.107 | length 9
  Top Layer w0.2: P4.34 74.57,86.271 U1.107
PCIE_TX1_P: P4.35 U1.106 | length 6
  Top Layer w0.2: U1.106 P4.35@75.84,84.999
PCIE_TX2_N: P5.17 U1.98 | length 8.8
  Top Layer w0.2: U1.98 86.216,66.72 P5.17
PCIE_TX2_P: P5.18 U1.99 | length 5.7
  Top Layer w0.2: U1.99 79.264,68.004 P5.18
PERST_N: P5.24 U1.105 | length 5.7
  Top Layer w0.254: U1.105 79.264,75.624 P5.24
RESET: P5.14 U1.95 | length 5.7
  Top Layer w0.254: U1.95 79.264,62.924 P5.14
RTS2_N: P3.6 U1.14 | length 5.2
  Top Layer w0.254: P3.6 29.239,59.089 U1.14
RTS3_N: P3.8 U1.16 | length 5.2
  Top Layer w0.254: P3.8 29.239,56.549 U1.16
RXD2: P3.3 U1.11 | length 8.2
  Top Layer w0.254: P3.3 22.841,62.91 U1.11
RXD3: P3.5 U1.13 | length 8.2
  Top Layer w0.254: P3.5 22.841,60.37 U1.13
TXD2: P3.2 U1.10 | length 5.2
  Top Layer w0.254: P3.2 29.239,64.169 U1.10
TXD3: P3.4 U1.12 | length 5.2
  Top Layer w0.254: P3.4 29.239,61.629 U1.12
USB2_N: J6.2 U1.18 | length 36.5
  Top Layer w0.381: U1.18 cw(c29.434,54.02) 29.434,54.204 v3@30.97,54.204
  Bottom Layer w0.381: J6.2 ccw(c12.332,39.428) 14.663,39.428 14.663,40.691 cw(c16.828,40.691) 15.297,42.222 15.561,42.486 cw(c16.623,41.424) 16.623,42.926 30.502,42.926 ccw(c30.502,45.466) 32.298,43.67 32.647,44.018 ccw(c31.298,45.367) 33.205,45.367 33.205,52.791 ccw(c31.818,52.791) 32.799,53.772 32.754,53.817 ccw(c31.882,52.946) 31.882,54.178 v3(30.945,54.178)
USB2_P: J6.3 U1.17 | length 37.6
  Top Layer w0.381: U1.17 ccw(c29.397,55.29) 29.397,55.143 v3(30.919,55.143) v3@30.97,55.143
  Bottom Layer w0.381: J6.3 cw(c17.628,39.428) 15.298,39.428 15.298,40.691 cw(c16.828,40.691) 15.746,41.773 16.01,42.037 cw(c16.623,41.424) 16.623,42.291 30.502,42.291 ccw(c30.502,45.466) 32.747,43.221 33.096,43.569 ccw(c31.298,45.367) 33.84,45.367 33.84,52.791 ccw(c31.818,52.791) 33.248,54.221 33.069,54.399 ccw(c31.273,52.603) 31.273,55.143 v3(30.919,55.143)
USB3_N: J7.2 U1.26 | length 26.6
  Top Layer w0.2: J7.2 13.341,51.411 cw(c11.793,52.959) 11.793,50.77 11.446,50.77 ccw(c11.446,49.497) 10.545,50.397 ccw(c11.809,49.133) 10.022,49.133 10.022,48.895 ccw(c11.157,48.895) 10.354,48.092 13.517,44.929 ccw(c15.048,46.46) 15.048,44.295 28.2,44.295 cw(c28.2,42.81) U1.26 U1.26@28.965,43.86
USB3_P: J7.3 U1.25 | length 25.3
  Top Layer w0.2: J7.3 13.341,49.729 ccw(c11.793,48.181) 11.793,50.37 11.446,50.37 ccw(c11.446,49.497) 10.828,50.114 ccw(c11.809,49.133) 10.422,49.133 10.422,48.895 ccw(c11.157,48.895) 10.637,48.375 13.8,45.212 ccw(c15.048,46.46) 15.048,44.695 28.2,44.695 ccw(c28.2,46.18) U1.25 U1.25@28.965,45.13
USB3_SS_RX_N: J7.5 U1.23 | length 14.7
  Top Layer w0.381: J7.5 cw(c16.648,44.922) 16.648,47.253 26.331,47.253 ccw(c26.331,48.784) 27.414,47.701 27.417,47.704 cw(c28.024,47.097) 28.024,47.955 28.561,47.955 cw(c28.561,46.981) U1.23
USB3_SS_RX_P: J7.6 U1.22 | length 14.7
  Top Layer w0.381: J7.6 ccw(c16.648,50.218) 16.648,47.888 26.155,47.888 ccw(c26.155,49.173) 27.064,48.264 cw(c27.974,47.354) 27.974,48.641 ccw(c27.974,49.662) 28.696,48.94 U1.22
USB3_SS_TX_N: J7.8 U1.21 | length 15
  Top Layer w0.381: J7.8 cw(c16.648,50.922) 16.648,53.253 20.675,53.253 cw(c20.675,50.078) 22.92,52.323 23.868,51.374 ccw(c26.113,53.619) 26.113,50.444 28.642,50.444 cw(c28.642,50.098) U1.21@28.887,50.343
USB3_SS_TX_P: J7.9 U1.20 | length 14.9
  Top Layer w0.381: J7.9 ccw(c16.648,56.218) 16.648,53.888 21.201,53.888 cw(c21.201,51.348) 22.997,53.144 24.317,51.823 ccw(c26.113,53.619) 26.113,51.079 27.775,51.079 ccw(c27.775,52.293) U1.20@28.633,51.435
WPS: P4.29 S1.1 U1.112 | length 53.8
  Top Layer w0.254: U1.112@68.221,79.021 P4.29
  Bottom Layer w0.3: S1.1 26.25,86 28.113,86 30.923,88.81 66.043,88.81 66.95,87.903 66.95,86.821 68.221,85.55 P4.29
pads on no net: J1. J2. J3. J4. J5. J6.5 J6.6 J6.7 J6.8 J7. J8. J8.A5 J8.B5 P4.36

## Polygon pours and split planes (outlines as drawn)
GND on Top Layer (solid, pour order 32): 0,22.5 90,22.5 90,90 20,90 20,60 0,60
no net on Top Layer (solid, pour order 26): 0,25
no net on Top Layer "Top Layer-No Net" (solid, pour order 14): 24.1,71.73
GND on Bottom Layer (solid, pour order 28): 20,60 0,60 0,25 90,25 90,90 20,90

## Other copper
Top Layer:
  rectangle net 3V3: 6,62.5 17,73.5

## Silkscreen, mask and mechanical layers (free items; w line width, h text height)
Top Overlay:
  lines w0.254: 6,62.5 17,62.5 17,73.5 6,73.5 6,62.5
  text "WPS" at 24.25,84.25 h1.52
  text "T" at 83.25,59.972 h1.52 r90
  text "R" at 83.25,57.472 h1.52 r90
Bottom Overlay:
Mechanical 1:
  the board outline again, w0.254

## Text inside footprints (layer, text, board x,y; h text height)
P2: Top Overlay "1" at 21.052,75.032 h1.27 r270; Top Overlay "2" at 23.592,75.54 h1.27 r270; Top Overlay "4" at 23.592,68.936 h1.27 r270; Top Overlay "3" at 21.052,68.936 h1.27 r270
P3: Top Overlay "2" at 23.592,66.709 h1.27 r270; Top Overlay "1" at 21.052,66.201 h1.27 r270; Top Overlay "7" at 21.052,55.025 h1.27 r270; Top Overlay "8" at 23.592,55.025 h1.27 r270
P4: Top Overlay "36" at 77.365,87.032 h1.27; Top Overlay "35" at 77.365,84.492 h1.27; Top Overlay "1" at 30.121,84.492 h1.27; Top Overlay "2" at 29.613,87.032 h1.27
P5: Top Overlay "1" at 88.008,45.144 h1.27 r90; Top Overlay "2" at 85.468,45.144 h1.27 r90; Top Overlay "23" at 88.008,77.148 h1.27 r90; Top Overlay "24" at 85.468,77.148 h1.27 r90